# Altium PCB TL4320同步整流.PcbDoc
Units mil, origin at the board's own origin, x right, y up, seen from the top; angles counter-clockwise.
Board outline 2660.24 x 1290.24 mil, 2 copper layers (Top Layer, Bottom Layer); 15 components, 9 nets, 60 pads, 0 vias.
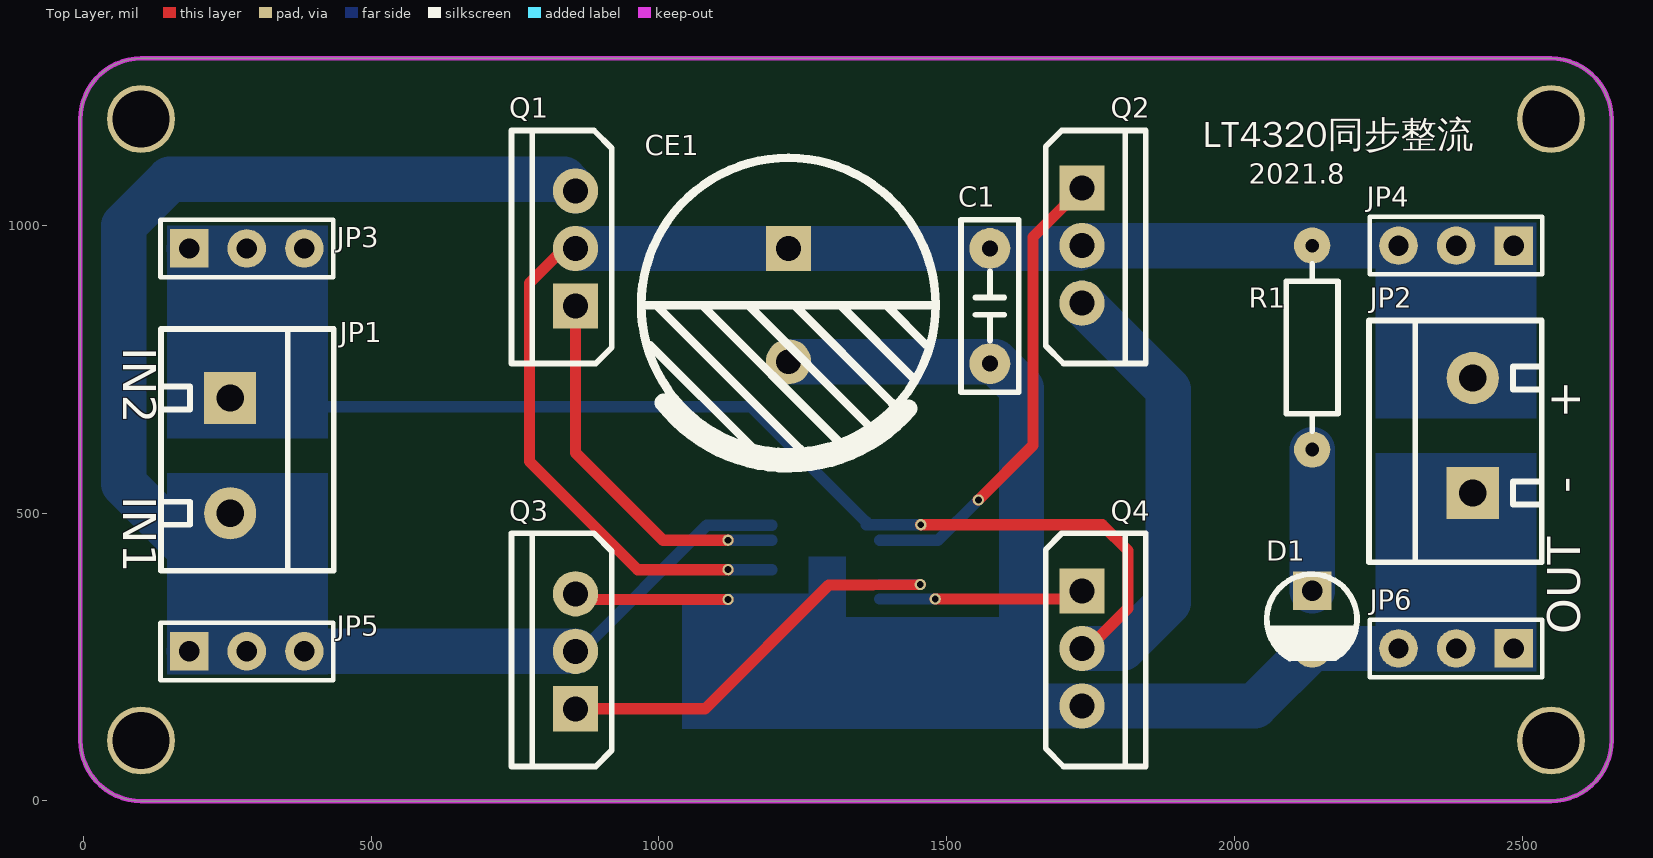
[diagram p0: Top Layer view]
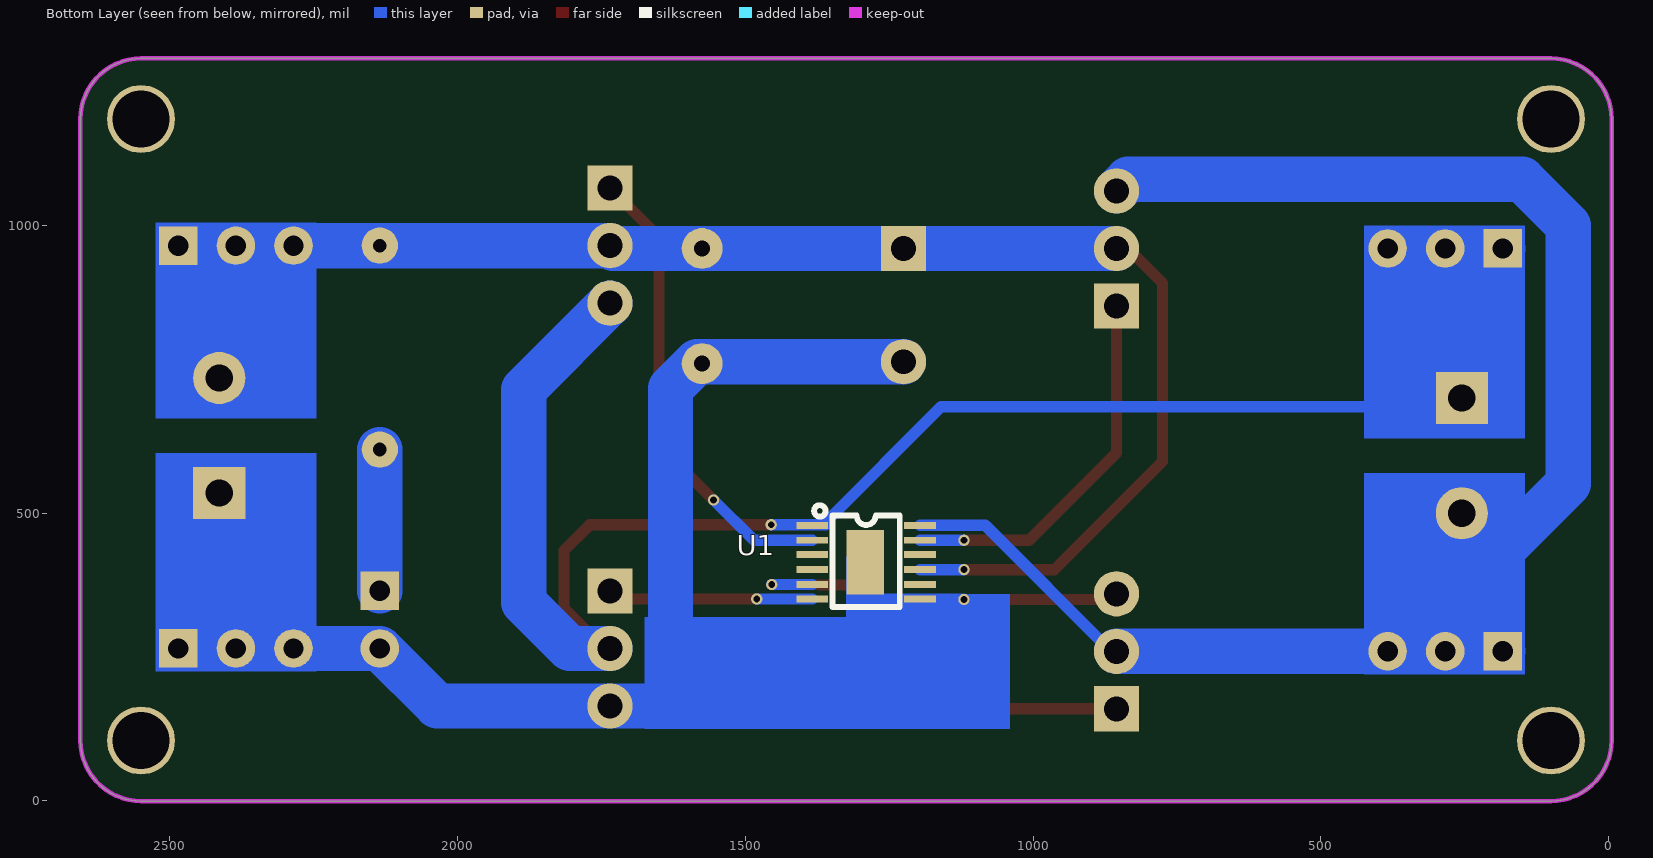
[diagram p1: Bottom Layer view, seen from below]

## Layer stack, top to bottom
Top Solder: solder mask 0.4, Solder Resist, Dk 3.5
Top Layer: signal copper 1.4
Dielectric 1: dielectric 12.6, FR-4, Dk 4.8
Bottom Layer: signal copper 1.4
Bottom Solder: solder mask 0.4, Solder Resist, Dk 3.5

## Board outline
-5.12,105 -5.12,1185 cw(c100,1185) 100,1290.12 2550,1290.12 cw(c2550,1185) 2655.12,1185 2655.12,105 cw(c2550,105) 2550,-0.12 100,-0.12 cw(c100,105)

## Design rules (kind name [scope] priority, off if disabled: settings)
Clearance [All] p1: gap=5 ignorepadtopadclearanceinfootprint=FALSE
PolygonConnect [All] p1: connectstyle=Relief reliefconductorwidth=10 reliefentries=4 polygonreliefangle="90 Angle" airgapwidth=10
RoutingVias [All] p1: holewidth=28 width=50 viastyle="Through Hole" minholewidth=28 minwidth=50 maxholewidth=28 maxwidth=50
SolderMaskExpansion [All] p1: expansion=4
Width [All] p1: maxlimit=157.48 minlimit=10 preferedwidth=10
30 further rules are at their usual default settings.

## Classes and differential pairs
component class LT4320同步整流: C1 D1 JP1 JP2 JP3 JP4 JP5 JP6 Q1 Q2 Q3 Q4 R1 U1

## Components (designator, comment, footprint, x,y, rotation, side; value= is the part's Value field where it differs from the comment)
C1 "104" MLCC5.08-A 1575,860 r90 top
CE1 "470uF" "CAP 5.0*12.5*20 - BK" 1225,861.57 r270 top
D1 "LED" "LED 3MM-R" 2135,315 r270 top
JP1 "HDR-1X2" KF301-5.0-2P 255,500 r270 top
JP2 "HDR-1X2" KF301-5.0-2P 2413.94,735 r90 top
JP3 "HDR-1X3" HDR2.54-LI-3P 283.94,960 r0 top
JP4 "HDR-1X3" HDR2.54-LI-3P 2385,965 r180 top
JP5 "HDR-1X3" HDR2.54-LI-3P 283.94,260 r0 top
JP6 "HDR-1X3" HDR2.54-LI-3P 2385,265 r180 top
Q1 "IRF630" TO220A 855,960 r90 top
Q2 "IRF630" TO220A 1735,965 r270 top
Q3 "IRF630" TO220A 855,260 r90 top
Q4 "IRF630" TO220A 1735,265 r270 top
R1 "10K" "RS 1/4W" 2135,787.83 r270 top
U1 "LT4320 MSOP" MSOP-12EP 1290,415 r180 bottom

## Footprints (in the part's own frame and the unit in brackets; to place one, negate y for a bottom-side part, rotate by r counter-clockwise, add the part's x,y. Pads: shape width x height; smd on the part's side, far side on the other; paste and mask are expansions set on the pad)
"CAP 5.0*12.5*20 - BK" [mm] "脚距5mm直径12.5mm高度20mm"
  rect 2x2 hole 1.1: 1(-2.5,0)
  round 2 hole 1.1: 2(2.5,0)
  silkscreen extent -6.5,-6.5 6.99,6.5, body extent -6.25,-6.25 6.26,6.25, height 20.26
HDR2.54-LI-3P [mm] "排针，3脚"
  rect 1.7x1.7 hole 0.9: 1(-2.54,0)
  round 1.7 hole 0.9: 2(0,0) 3(2.54,0)
  silkscreen extent -3.81,-1.27 3.81,1.27, body extent -3.81,-1.27 3.81,1.27, height 2.54
KF301-5.0-2P [mm] "可拼接端子/6A"
  rect 2.3x2.3 hole 1.2: 1(-5.08,0)
  round 2.3 hole 1.2: 2(0,0)
  silkscreen extent -8.13,-3.05 2.54,4.57, body extent -7.95,-3 2.55,4.6, height 3.29
"LED 3MM-R" [mm] "红色3mm直插LED"
  rect 1.7x1.7 hole 0.9: 1(-1.27,0)
  round 1.7 hole 0.9: 2(1.27,0)
  silkscreen extent -2.01,-2 1.72,1.98, body extent -1.95,-1.95 1.64,1.95, height 5.55
MLCC5.08-A [mm] "独石电容，脚距5.08mm"
  round 1.8 hole 0.7: 1(-2.54,0) 2(2.54,0)
  silkscreen extent -3.81,-1.27 3.81,1.27, body extent -2.79,-1 2.79,1, height 3.82
MSOP-12EP [mil]
  rect 55x12 smd: 1(-93.5,64) 2(-93.5,38) 3(-93.5,13) 4(-93.5,-13) 5(-93.5,-39) 6(-93.5,-64) 7(93.5,-64) 8(93.5,-39) 9(93.5,-13) 10(93.5,13) 11(93.5,38) 12(93.5,64)
  rect 64.96x112.2 smd: 13(-1.5,0)
  silkscreen extent -90,-78 58,99
"RS 1/4W" [mm] "直插色环电阻，脚距9mm，直径2.3mm"
  round 1.6 hole 0.6: 1(-4.5,0) 2(4.5,0)
  silkscreen extent -3.68,-1.14 3.68,1.14, body extent -4.72,-1.16 4.73,1.16, height 2.32
TO220A [mm] "220，3脚晶体管  封装库来自淘宝卖家 ID：黄晶宝石"
  rect 2x2 hole 1.1: 1(-2.54,0)
  round 2 hole 1.1: 2(0,0) 3(2.54,0)
  silkscreen extent -5.08,-1.6 5.21,2.82, body extent -5.15,-1.53 5.15,2.9, height 3.5

## Part data
C1: library part CC, "瓷片电容"
CE1: library part CE, "直插电解电容"
D1: "发光二极管"
JP1 JP2: library part "Header 2", "2P接插件"
JP3 JP4 JP5 JP6: library part "Header 3", "3P接插件"
Q1 Q2 Q3 Q4: "N沟道 200V/9.2A"
R1: library part R-S, "色环电阻"
U1: "LT4320 封装形式MSOP-12"

## Free pads (board coordinates)
  round 118.11 hole 98.43: 2(100,105) 2(100,1185) 2(2550,105) 2(2550,1185)
  round 19.68 hole 11.81: 3(1455,480) 3(1555,523) 4(1120,350.16) 4(1120,402) 4(1120,453) 4(1454,376) 4(1480,351)

## Nets (pads, with @x,y where several pads share a name; then routed paths per layer and width w, separated by ;. In a path a pad name is that pad's centre, name@x,y a point inside that pad or via, vN(x,y) a via of type N, cw(c..) or ccw(c..) an arc to the next point about the centre after c; other vN are vias at no path point)
BG1: pad.4@1480,351 Q4.1 U1.6 | length 357.3
  Top Layer w19.68: pad.4@1480,351 1721,351 Q4.1
  Bottom Layer w19.68: U1.6 pad.4@1480,351
BG2: pad.4@1454,376 Q3.1 U1.5 | length 758.6
  Top Layer w19.68: Q3.1 1080,160 1295,375 pad.4@1454,376
  Bottom Layer w19.68: U1.5 pad.4@1454,376
in1: JP1.2 JP5.1 JP5.2 JP5.3 Q1.3 Q3.2 U1.12 | length 2892.2
  Bottom Layer w19.68: Q3.2 864,260 1083,479 U1.12
  Bottom Layer w78.74: JP5.1 JP5.2 ; JP1.2 255,366.15 ; Q3.2 JP5.3 JP5.2 ; Q1.3 835,1080 150,1080 70,1000 70,551.15 255,366.15 ; 255,366.15 255,288.94 JP5.2
in2: JP1.1 JP3.1 JP3.2 JP3.3 pad.3@1455,480 Q2.3 Q4.2 U1.1 | length 3113.9
  Top Layer w19.68: pad.3@1455,480 1770,480 1815,435 1815,335 1745,265 Q4.2
  Bottom Layer w19.68: JP1.1 370,700 385,685 1160,685 1360,485 ; U1.1@1360,480 pad.3@1455,480
  Bottom Layer w78.74: JP3.1 JP3.2 ; JP1.1 255,931.06 JP3.2 ; JP3.3 JP3.2 ; Q4.2 1805,265 1885,345 1885,715 Q2.3
NetD1_1: D1.1 R1.2 | length 245.7
  Bottom Layer w78.74: D1.1 R1.2
OUTN: C1.1 CE1.2 D1.2 JP2.1 JP6.1 JP6.2 JP6.3 pad.4@1120,350.16 Q3.3 Q4.3 U1.7 U1.13 | length 2297.7
  Top Layer w19.68: Q3.3 864.84,350.16 pad.4@1120,350.16
  Bottom Layer w19.68: pad.4@1120,350.16 1120.84,351 U1.7 1280,351 ; U1.13@1291.5,391.38 U1.13
  Bottom Layer w78.74: CE1.2 1583.88,763.15 1630,717.02 1630,220 ; 1605,170 1610,165 Q4.3 2035,165 D1.2 JP6.3 JP6.2 JP6.1
OUTP: C1.2 CE1.1 JP2.2 JP4.1 JP4.2 JP4.3 pad.4@1120,402 Q1.2 Q2.2 R1.1 U1.9 | length 2536.3
  Top Layer w19.68: Q1.2 835,960 775,900 775,590 963,402 pad.4@1120,402
  Bottom Layer w19.68: pad.4@1120,402 U1.9
  Bottom Layer w78.74: Q1.2 1730,960 Q2.2 ; Q2.2@1745,965 R1.1 JP4.3 JP4.2 JP4.1
TG1: pad.4@1120,453 Q1.1 U1.11 | length 659.5
  Top Layer w19.68: Q1.1 855,605 1007,453 pad.4@1120,453
  Bottom Layer w19.68: pad.4@1120,453 U1.11
TG2: pad.3@1555,523 Q2.1 U1.2 | length 817.1
  Top Layer w19.68: pad.3@1555,523 1650,618 1650,980 Q2.1
  Bottom Layer w19.68: U1.2 1485,453 pad.3@1555,523
pads on no net: U1.3 U1.4 U1.8 U1.10

## Keep-outs
Keep-Out Layer:
  the board outline again, w7.87

## Other copper
Bottom Layer:
  rectangle net OUTN: 1255,125 1675,320
  rectangle net OUTN: 1040,125 1325,360
  rectangle net in2: 145,630 425,1000
  rectangle net in1: 145,220 425,570
  rectangle net OUTP: 2245,665 2525,1005
  rectangle net OUTN: 2245,225 2525,605
  rectangle net OUTN: 1260,341 1325,425

## Silkscreen, mask and mechanical layers (free items; w line width, h text height)
Top Overlay:
  text "LT4320同步整流" at 1945,1120 h78.74
  text "2021.8" at 2025,1060 h60
  text "IN2     IN1" at 50,788 h98.43 r270
  text "OUT   -    +" at 2620,290 h98.43 r90
Bottom Solder:
  rectangle: 1320,125 1675,320
  rectangle: 1040,125 1325,360
  rectangle: 2245,255 2525,605
  rectangle: 2245,665 2525,1000
  rectangle: 145,630 425,995
  rectangle: 145,220 425,570
  lines w78.74: 183.94,260 855,260 ; 205,415 70,550 70,1000 150,1080 835,1080 855,1060 ; 855,960 2485,960 ; 1225,763.15 1581.85,763.15 1630,715 1630,165 2035,165 2135,265 2485,265 ; 1735,265 1810,265 1885,340 1885,715 1735,865 ; 855,1060 855,1060 ; 1735,865 1735,865 ; 2135,610.67 2135,610.67